# EAGLE board eilzugwagen (EAGLE 9.5.2)
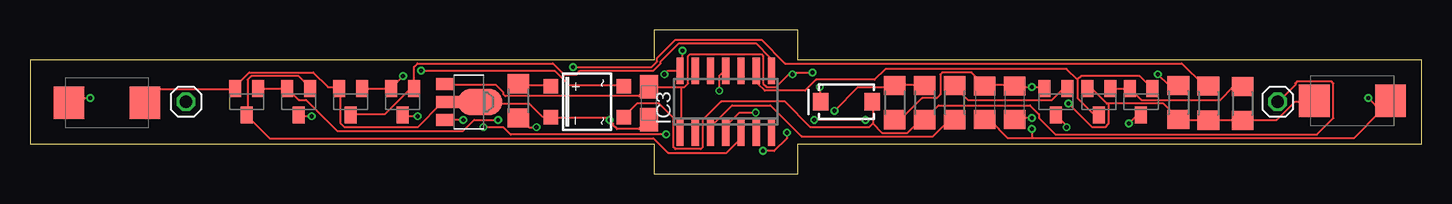
[diagram p0: board, top side]
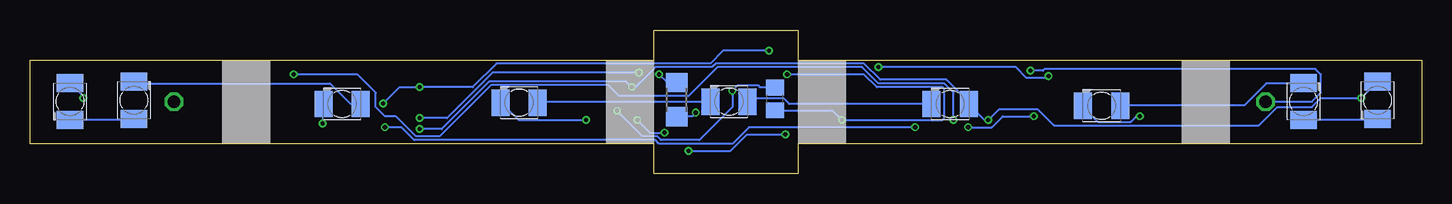
[diagram p1: board, bottom side, seen from below]

Size 116 x 12 mm. Coordinates in mm from the lower left corner, seen from the top.
Outline: 0,2.5 52,2.5 52,0 64,0 64,2.5 116,2.5 116,9.5 64,9.5 64,12 52,12 52,9.5 0,9.5 0,2.5
Copper layers (1*16): Top 0.035mm / dielectric 1.5mm / Bottom 0.035mm
Design rules "default *": minimum track width 6mil, minimum drill 0.35mm, track to track 6mil, track to pad 6mil, pad to pad 6mil, via to via 6mil, smd to smd 6mil, copper to edge 6mil, drill to drill 6mil, minimum pad ring 6mil, minimum via ring 6mil, stop-mask expansion 4mil, vias tented up to drill 0mil, thermal gap 10mil

## Footprints (pad centres in the part's own frame; a part is rotated, then mirrored left to right if it is on the bottom)
SOIC-4 = smd 1.2 x 1.2: + 1.3,3.05; - -1.3,3.05; ~1 -1.3,-3.05; ~2 1.3,-3.05
C0805 = smd 1.3 x 1.5: 1 -0.95,0; 2 0.95,0
C3216 = smd 1.6 x 1.8: 1 -1.4,0; 2 1.4,0
A/3216-18R = smd 1.95 x 1.5: + 1.375,0; - -1.375,0
D/7343-31R = smd 2.55 x 2.7: + 3.175,0; - -3.175,0
SMA-DIODE = smd 1.27 x 1.47: A -2.15,0; C 2.15,0
SOT89 = smd 1 x 1.5: 1 -1.499,-1.981; 3 1.499,-1.981 | smd 1 x 2: 2 0,-1.727 | smd 2.2 x 3.7: 2@1 0,0.94
SO-14 = smd 0.6 x 2.2: 1 -3.81,-2.6; 2 -2.54,-2.6; 3 -1.27,-2.6; 4 0,-2.6; 5 1.27,-2.6; 6 2.54,-2.6; 7 3.81,-2.6; 8 3.81,2.6; 9 2.54,2.6; 10 1.27,2.6; 11 0,2.6; 12 -1.27,2.6; 13 -2.54,2.6; 14 -3.81,2.6
1X01 = drill 1.016 octagon: 1 0,0
KA-3528ASYC = smd 1.5 x 2.2: A -1.55,0; C 1.55,0
SOT23-BEC = smd 1 x 1.4: B -0.95,-1.1; C 0,1.1; E 0.95,-1.1
R1206 = smd 1.6 x 1.803: 1 -1.422,0; 2 1.422,0

## Placement (x,y rotation side)
B1  MB4S  [SOIC-4]  46.45,6 90 top
C1  47p  [C0805]  53.91,6.24 90 bottom
C2  100n  [C3216]  82.09,5.92 90 top
C3  100n  [C3216]  79.59,5.92 270 top
C5  1u/10V  [A/3216-18R]  51.59,5.89 90 top
C7  10u/35V  [D/7343-31R]  110.24,6.08 0 top
C8  10u/35V  [D/7343-31R]  6.42,5.92 180 top
D1  1A/40V/500mV  [SMA-DIODE]  68.06,6 180 top
IC2  78L05F  [SOT89]  36.58,5.98 270 top
IC3  16F18324-SL  [SO-14]  58,6 0 top
JP3  [1X01]  104,6 0 top
JP4  [1X01]  13,6 0 top
LED1  [KA-3528ASYC]  3.66,6.13 270 bottom
LED2  [KA-3528ASYC]  9.84,6.02 90 bottom
LED3  [KA-3528ASYC]  26.67,5.66 180 bottom
LED5  [KA-3528ASYC]  112.66,6.03 270 bottom
LED6  [KA-3528ASYC]  107.34,6.12 90 bottom
LED7  [KA-3528ASYC]  89.99,5.81 180 bottom
LED9  [KA-3528ASYC]  39.29,5.81 180 bottom
LED10  [KA-3528ASYC]  57.72,6.01 180 bottom
LED11  [KA-3528ASYC]  75.22,5.92 180 bottom
Q1  BC817-25SMD  [SOT23-BEC]  85.52,6 180 top
Q4  BC817-16SMD  [SOT23-BEC]  92.62,6 180 top
Q5  BC817-16SMD  [SOT23-BEC]  89.1,6 180 top
Q6  BC817-16SMD  [SOT23-BEC]  31.07,6 180 top
Q7  BC817-16SMD  [SOT23-BEC]  26.74,6 180 top
Q8  BC817-16SMD  [SOT23-BEC]  22.4,6 180 top
Q9  BC817-16SMD  [SOT23-BEC]  18.07,6 180 top
R1  220R  [R1206]  40.71,6.08 90 top
R2  1k5  [R1206]  77.09,5.92 270 top
R7  22k  [R1206]  74.59,5.92 90 top
R8  10k  [R1206]  72.09,5.92 90 top
R11  10k  [R1206]  62.09,6.18 270 bottom
R13  [R1206]  101.08,5.85 90 top
R14  [R1206]  98.23,5.89 90 top
R15  [R1206]  95.73,5.93 90 top

## Library data of the parts
B1 = rectifier
C1-C3 C5 C7 C8 = rcl; SPICEPREFIX: C
D1 = SparkFun-DiscreteSemi; PROD_ID: DIO-08053
IC2 = linear
IC3 = microchip; MF: MICROCHIP; MPN: PIC16F676-I/SL; OC_FARNELL: 9760520; OC_NEWARK: 92C4557
JP3 JP4 = pinhead
LED1-LED3 LED5-LED7 LED9-LED11 = led
Q1 Q4-Q9 = transistor-npn
R1 R2 R7 R8 R11 R13-R15 = rcl; SPICEPREFIX: R

## Nets
60MA: IC3.3 R2.2
+5V: C2.1 C5.+ IC2.1 IC3.1 R11.1
+15V: C3.2 C7.+ C8.+ D1.C IC2.3 LED1.A LED5.A LED9.A
COMMAND: C1.2 IC3.11 R7.2 R8.2
GND: B1.- C1.1 C2.2 C3.1 C5.- C7.- C8.- IC2.2 IC2.2@1 IC3.14 Q1.E Q5.E Q7.E Q9.E R8.1 R13.1 R14.1 R15.1
N$1: B1.~2 JP4.1
N$2: B1.~1 D1.A JP3.1 R7.1
N$3: Q1.C R1.1
N$4: Q1.B R2.1
N$5: B1.+ R1.2
N$16: LED10.C LED11.A
N$18: Q4.E Q5.B R13.2
N$19: LED6.C LED7.A
N$20: LED2.C LED3.A
N$21: LED1.C LED2.A
N$22: LED5.C LED6.A
N$23: LED9.C LED10.A
N$25: Q6.E Q7.B R14.2
N$26: Q8.E Q9.B R15.2
N$28: IC3.4 R11.2
N$30: LED3.C Q8.C
N$31: LED11.C Q6.C
N$32: LED7.C Q4.C
PWM1: IC3.5 Q8.B Q9.C
PWM2: IC3.9 Q4.B Q5.C
PWM3: IC3.8 Q6.B Q7.C
PWM4: IC3.7
PWM5: IC3.2
PWM6: IC3.10

## Tracks (layer width: path | path; a pad name or v marks a point on that pad's centre or on a via)
60MA
  Top 0.152: R2.2 76.96,4.48 76.66,4.48 75.29,3.11 64.31,3.11 61.72,5.7 58.52,5.7 56.84,4.02 56.84,3.41 IC3.3
+5V  (via drill 0.35)
  Top 0.152: IC2.1 34.75,7.38 38.86,7.38 39.47,6.77 39.47,6.62 39.62,6.46 50.75,6.46 51.51,7.22 C5.+ 51.66,7.22 54.25,7.22 | v83.52,4.63 82.14,4.63 C2.1 | 63.55,8.44 63.4,8.44 62.18,7.22 61.42,7.22 61.11,7.53 61.11,9.82 60.96,9.97 55.02,9.97 54.86,9.82 54.86,7.53 54.56,7.22 54.25,7.22 | 63.55,8.44 v65.23,8.44 | 63.55,8.44 v63.55,8.29 | 54.25,7.22 54.25,3.41 IC3.1
  Bottom 0.152: v83.52,4.63 81.23,4.63 77.42,8.44 v65.23,8.44 | v63.55,8.29 62.94,7.68 62.18,7.68 R11.1
+15V  (via drill 0.35)
  Top 0.152: 83.52,2.96 110.34,2.96 112.62,5.24 | 83.52,2.96 81.53,2.96 80.01,4.48 79.7,4.48 C3.2 | 112.62,5.24 113.39,6 C7.+ 112.62,5.24 | 112.62,5.24 v111.56,6.31 | v5.03,6.31 3.66,6.31 3.35,6 C8.+ | v65.84,7.22 65.84,6 D1.C | v36.12,4.48 34.75,4.48 IC2.3 | v83.52,3.72 83.52,2.96
  Bottom 0.152: v111.56,6.31 111.56,6.46 112.62,7.53 LED5.A | LED1.A 3.81,7.53 v5.03,6.31 8.38,6.31 9.14,5.55 12.04,5.55 13.56,4.02 30.63,4.02 32,5.4 35.2,5.4 v36.12,4.48 36.42,4.48 37.64,5.7 LED9.A 37.64,5.85 39.62,7.83 45.11,7.83 46.48,9.21 58.83,9.21 59.13,8.9 63.86,8.9 65.53,7.22 v65.84,7.22 66.29,7.68 77.72,7.68 81.69,3.72 v83.52,3.72
COMMAND  (via drill 0.35)
  Top 0.152: R7.2 74.52,7.38 72.24,7.38 R8.2 72.08,7.22 69.04,7.22 v67.06,5.24 | v57.45,6.92 57.45,8.14 57.91,8.6 IC3.11
  Bottom 0.152: C1.2 53.95,7.22 55.17,7.22 55.32,7.38 57,7.38 v57.45,6.92 57.45,5.55 60.2,2.81 63.4,2.81 63.7,3.11 64.92,3.11 v67.06,5.24
GND  (via drill 0.35)
  Top 0.152: Q1.E 84.43,7.22 v83.52,7.22 82.14,7.22 C2.2 81.99,7.38 79.7,7.38 C3.1 79.55,7.38 78.49,8.44 76.05,8.44 75.89,8.29 75.89,6.62 75.59,6.31 74.37,6.31 72.69,4.63 72.24,4.63 R8.1 | 89.92,5.85 94.49,5.85 95.71,4.63 R15.1 95.86,4.48 98.15,4.48 R14.1 98.3,4.48 101.04,4.48 R13.1 101.19,4.48 103.94,4.48 105.46,6 106.98,6 C7.- | 89.92,5.85 89.76,5.85 88.54,7.07 88.24,7.07 Q5.E | v86.56,5.85 88.54,3.87 89.61,3.87 89.92,4.18 89.92,5.85 | C8.- 9.6,6 10.67,7.07 17.07,7.07 Q9.E 17.07,7.22 18.29,8.44 23.62,8.44 24.84,7.22 25.76,7.22 Q7.E 25.91,7.07 25.91,4.18 26.21,3.87 32.31,3.87 34.29,5.85 34.75,5.85 IC2.2 34.9,6 37.49,6 IC2.2@1 37.64,5.85 41.6,5.85 42.67,4.79 43.28,4.79 B1.- 43.43,4.63 48.16,4.63 v48.31,4.48 48.62,4.18 48.62,4.02 48.92,3.72 50.75,3.72 51.51,4.48 C5.- | v52.88,8.29 53.19,8.6 54.1,8.6 IC3.14 54.25,8.75 54.41,8.9 v54.41,10.27
  Bottom 0.152: v86.56,5.85 85.19,7.22 v83.52,7.22 79.1,7.22 77.11,9.21 59.28,9.21 58.22,10.27 v54.41,10.27 | C1.1 53.8,5.24 49.07,5.24 v48.31,4.48 39.93,4.48 39.78,4.63 39.78,7.07 39.93,7.22 45.41,7.22 46.48,8.29 v52.88,8.29
N$1  (via drill 0.35)
  Top 0.152: v32.61,8.6 43.74,8.6 44.96,7.38 49.38,7.38 B1.~2
  Bottom 0.152: v32.61,8.6 31.55,8.6 31.39,8.75 8.84,8.75 8.38,8.29 8.38,6.77 9.14,6 12.95,6 JP4.1
N$2
  Top 0.152: 70.26,4.18 69.95,3.87 65.08,3.87 62.94,6 57.61,6 56.08,4.48 56.08,2.19 55.93,2.04 53.8,2.04 53.65,2.19 53.65,4.63 52.43,5.85 50.6,5.85 49.53,4.79 B1.~1 | 70.26,4.18 70.26,5.85 D1.A | 70.26,4.18 71.02,3.41 73.15,3.41 74.22,4.48 74.52,4.48 R7.1 74.68,4.63 75.74,5.7 83.36,5.7 84.12,4.94 84.12,4.63 85.5,3.26 107.29,3.26 108.66,4.63 108.66,7.53 108.51,7.68 105.61,7.68 105.46,7.53 105.46,7.38 104.09,6 JP3.1
N$3  (via drill 0.35)
  Top 0.152: v86.41,3.87 86.41,4.02 85.65,4.79 Q1.C | v42.22,3.87 41.6,3.87 40.84,4.63 R1.1
  Bottom 0.152: v86.41,3.87 85.04,3.87 83.97,2.81 63.86,2.81 63.55,2.5 57.45,2.5 56.08,3.87 v42.22,3.87
N$4
  Top 0.152: Q1.B 86.41,7.07 86.11,7.07 85.19,6.16 78.18,6.16 77.11,7.22 R2.1
N$5
  Top 0.152: B1.+ 43.28,7.38 40.84,7.38 R1.2
N$16
  Bottom 0.152: LED10.C 59.28,6 73.61,6 LED11.A
N$18
  Top 0.152: Q5.B 90.07,7.07 91.59,7.07 Q4.E 91.75,7.07 92.66,6.16 99.21,6.16 100.28,7.22 101.04,7.22 R13.2
N$19
  Bottom 0.152: LED7.A 88.54,5.85 89.31,5.85 90.98,7.53 107.29,7.53 LED6.C
N$20
  Bottom 0.152: LED3.A 24.99,5.7 14.78,5.7 12.95,7.53 9.91,7.53 LED2.C
N$21
  Bottom 0.152: LED2.A 9.75,4.48 3.81,4.48 LED1.C
N$22
  Bottom 0.152: LED5.C 112.62,4.48 107.44,4.48 LED6.A
N$23
  Bottom 0.152: LED9.C 40.84,5.85 52.73,5.85 53.19,6.31 55.93,6.31 56.08,6.16 LED10.A
N$25  (via drill 0.35)
  Top 0.152: Q7.B 27.74,7.07 30.02,7.07 Q6.E 30.18,7.22 v31.09,8.14 | v45.26,8.9 51.82,8.9 52.27,9.36 52.27,9.66 53.8,11.19 60.96,11.19 62.94,9.21 96.01,9.21 97.84,7.38 98.15,7.38 R14.2
  Bottom 0.152: v45.26,8.9 33.83,8.9 32.92,7.99 31.24,7.99 v31.09,8.14
N$26  (via drill 0.35)
  Top 0.152: Q9.B 19.05,7.07 21.34,7.07 Q8.E 21.49,7.07 22.4,6.16 23.01,6.16 25.6,3.57 36.12,3.57 37.03,4.48 v39.01,4.48 | v94.03,8.29 94.94,7.38 95.71,7.38 R15.2
  Bottom 0.152: v94.03,8.29 88.7,8.29 87.17,6.77 87.17,5.55 86.41,4.79 85.5,4.79 83.82,3.11 81.84,3.11 77.57,7.38 67.82,7.38 66.9,6.46 61.11,6.46 58.67,8.9 46.63,8.9 45.26,7.53 39.78,7.53 39.01,6.77 v39.01,4.48
N$28  (via drill 0.35)
  Top 0.152: v60.5,5.09 59.13,5.09 58.06,4.02 58.06,3.41 IC3.4
  Bottom 0.152: v60.5,5.09 60.81,4.79 62.03,4.79 R11.2
N$30  (via drill 0.35)
  Top 0.152: v23.47,4.79 22.55,4.79 Q8.C
  Bottom 0.152: v23.47,4.79 23.77,4.79 24.23,4.33 26.98,4.33 28.19,5.55 LED3.C
N$31  (via drill 0.35)
  Top 0.152: v32.31,4.79 31.09,4.79 Q6.C | v37.8,3.87 39.47,3.87 40.08,3.26 v53.03,3.26 | v61.11,1.89 62.03,1.89 63.09,2.96 v63.09,3.41 | v69.65,4.48 v65.38,4.48
  Bottom 0.152: v32.31,4.79 34.9,4.79 35.81,3.87 v37.8,3.87 | v53.03,3.26 56.24,3.26 57.61,1.89 v61.11,1.89 | v63.09,3.41 64.31,3.41 v65.38,4.48 | v69.65,4.48 75.29,4.48 76.66,5.85 LED11.C
N$32  (via drill 0.35)
  Top 0.152: v91.59,4.18 92.2,4.79 92.51,4.79 Q4.C
  Bottom 0.152: v91.59,4.18 91.59,5.7 LED7.C
PWM1
  Top 0.152: Q8.B 23.32,7.22 22.4,8.14 18.44,8.14 18.14,7.83 18.14,4.94 Q9.C 18.14,4.79 19.96,2.96 51.97,2.96 53.19,1.74 58.06,1.74 59.13,2.81 59.13,3.26 IC3.5
PWM2
  Top 0.152: 87.33,7.83 87.33,6.31 88.7,4.94 89,4.94 Q5.C | 87.33,7.83 87.63,8.14 92.51,8.14 93.42,7.22 Q4.B | 87.33,7.83 86.41,8.75 71.32,8.75 70.41,7.83 65.53,7.83 64.62,6.92 61.27,6.92 60.66,7.53 60.66,8.6 IC3.9
PWM3
  Top 0.152: Q7.C 26.82,4.94 29.57,4.94 31.7,7.07 32,7.07 Q6.B 32,7.22 32,8.9 32.31,9.21 43.59,9.21 44.5,8.29 45.57,8.29 45.87,8.6 51.97,8.6 52.58,9.21 52.58,9.36 54.1,10.88 60.5,10.88 61.72,9.66 61.72,8.75 IC3.8